# Altium PCB MCU.PcbDoc
Units mm, origin at the board's own origin, x right, y up, seen from the top; angles counter-clockwise.
Board outline 54.25 x 54.25 mm, 2 copper layers (Top Layer, Bottom Layer); 81 components, 68 nets, 250 pads, 113 vias.
Unrouted connection lines stored in the file: 1.
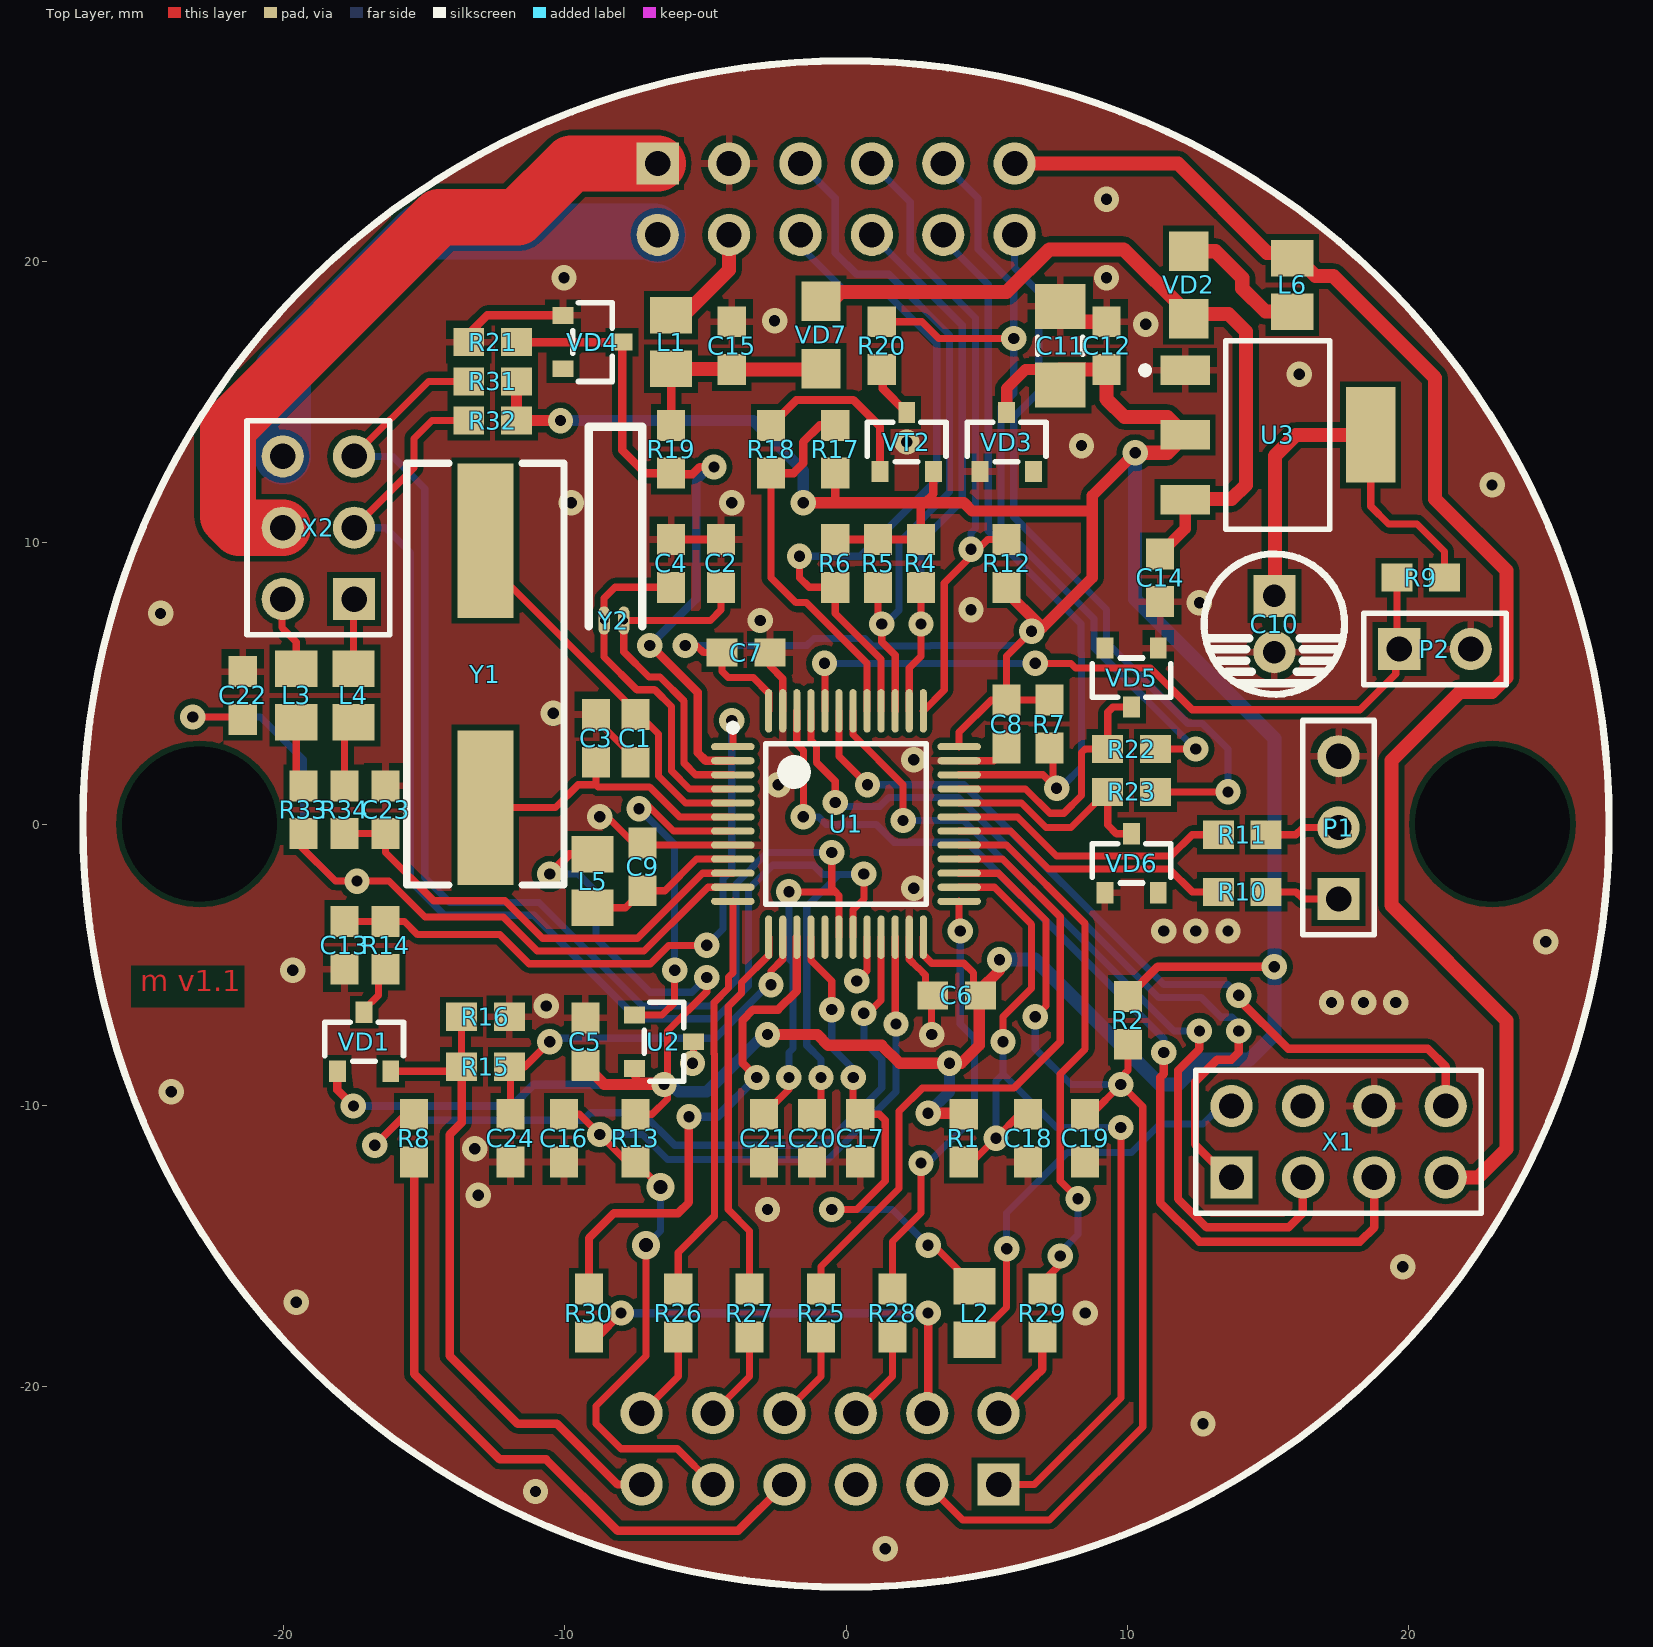
[diagram p0: Top Layer view]
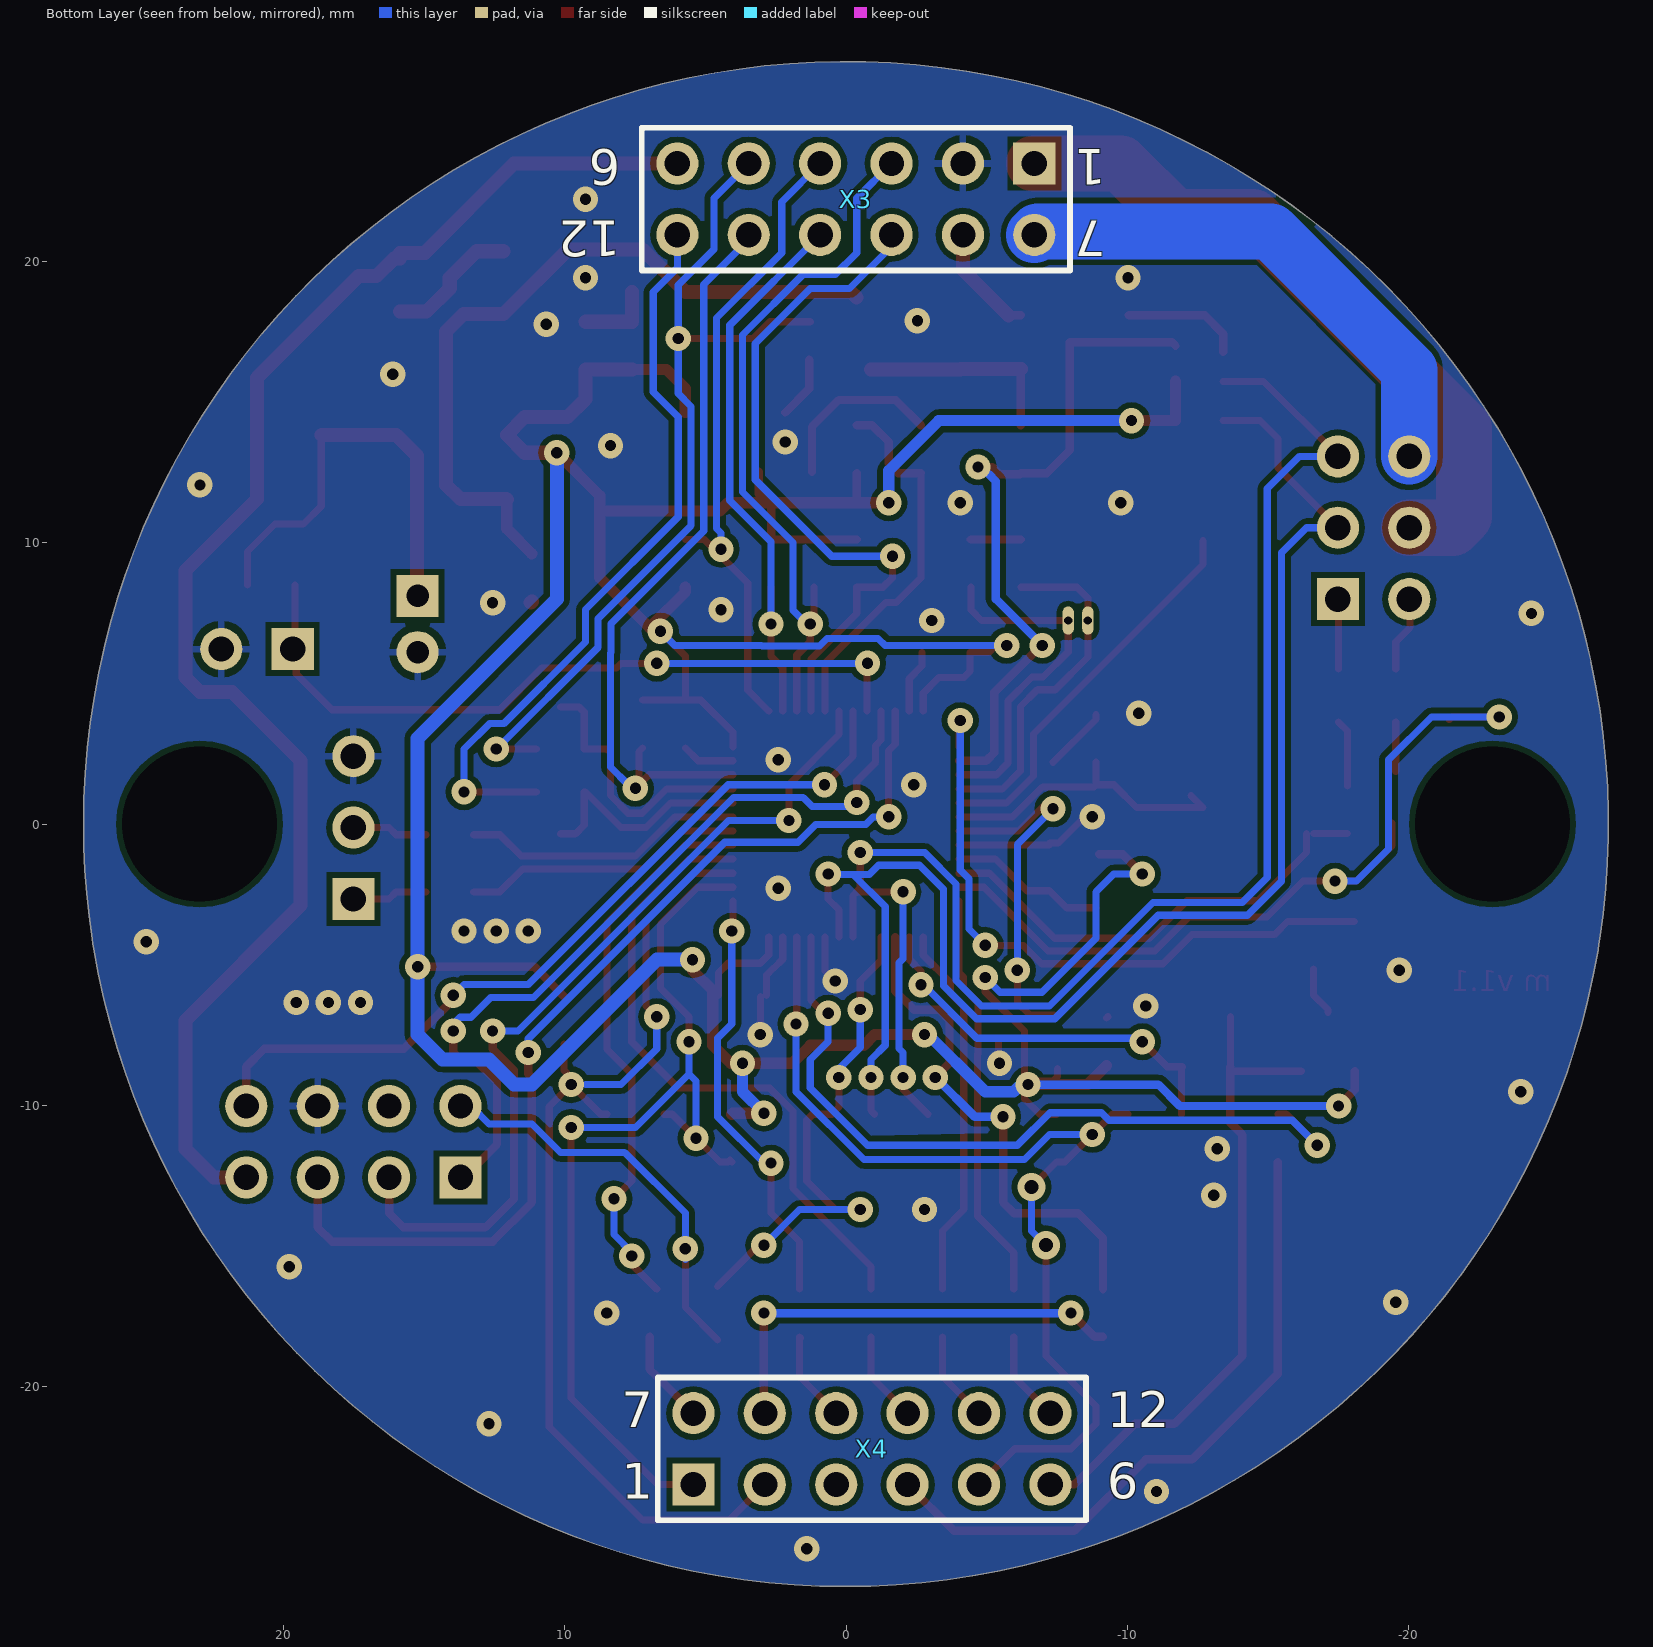
[diagram p1: Bottom Layer view, seen from below]
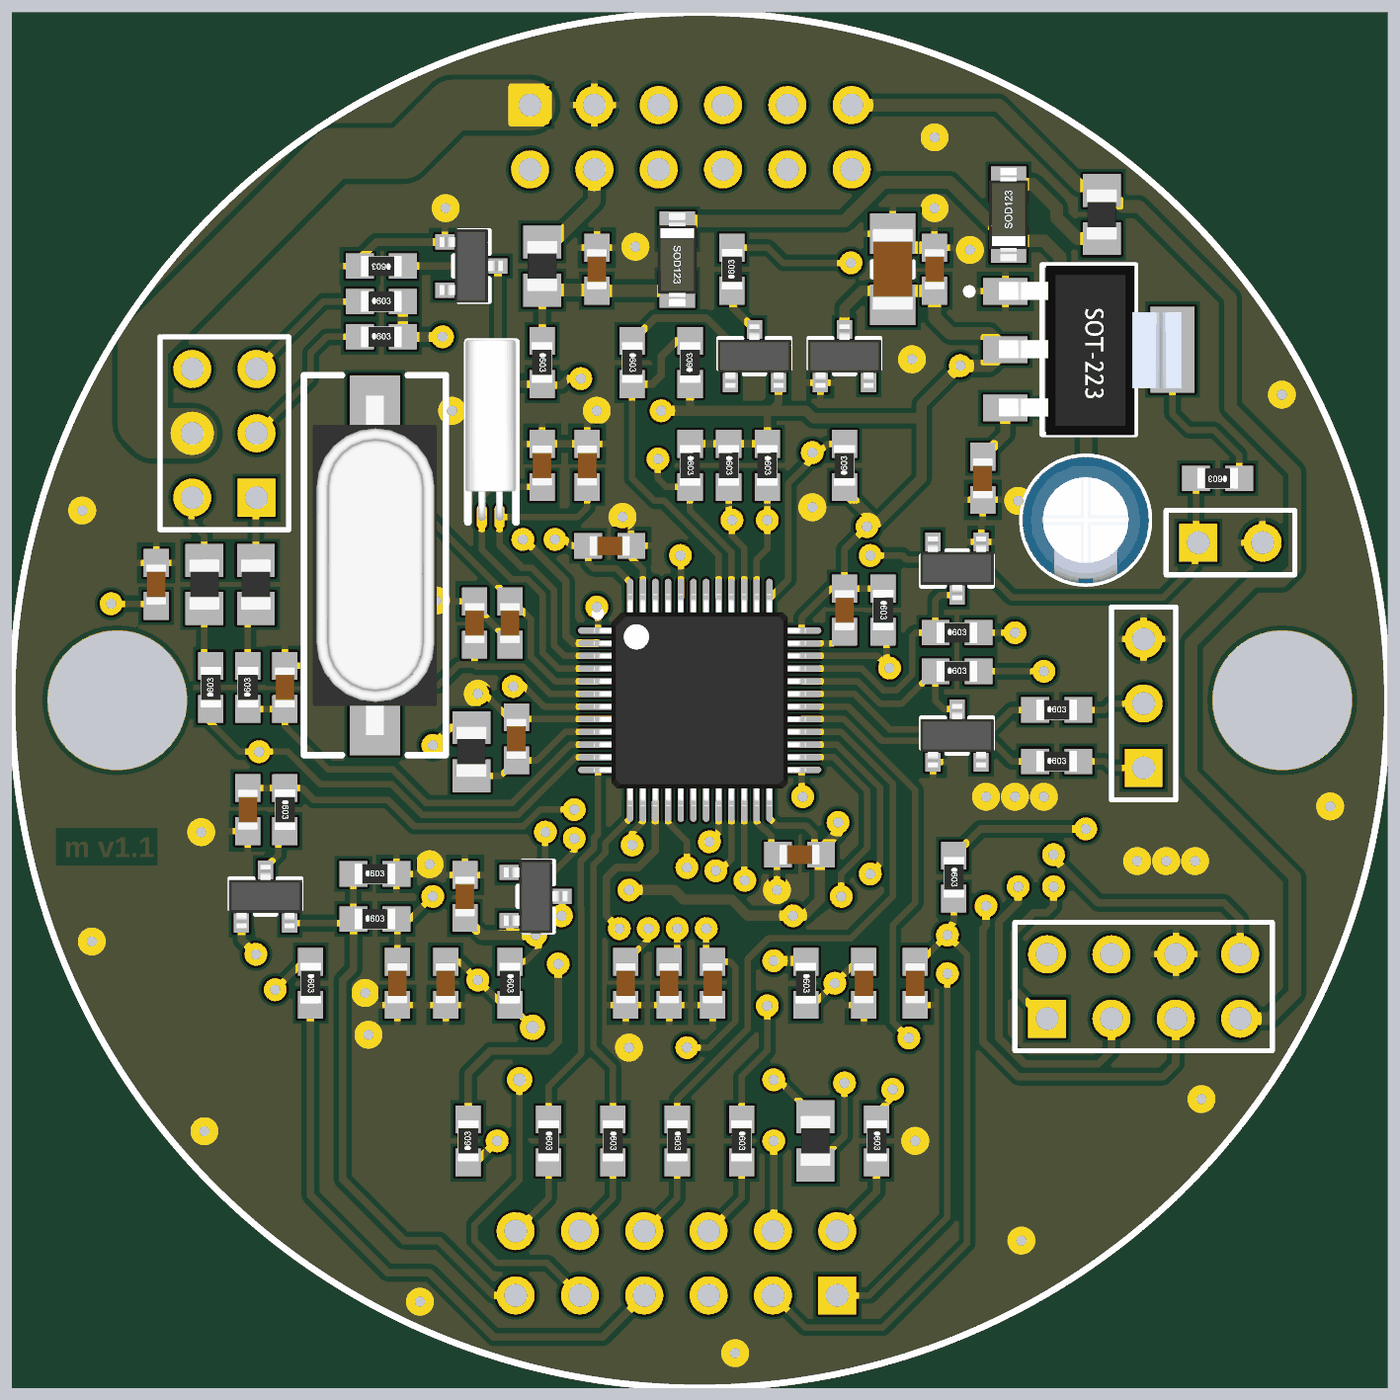
[diagram p2: 3D render of the assembled board from above, using the file's embedded part models]

## Layer stack, top to bottom
Top Solder: solder mask 0.0102, Solder Resist, Dk 3.5
Top Layer: signal copper 0.0356
Dielectric1: dielectric 0.32, FR-4, Dk 4.8
Bottom Layer: signal copper 0.0356
Bottom Solder: solder mask 0.0102, Solder Resist, Dk 3.5

## Board outline
-26.755,-4.48 cw(c0,0) -26.818,-4.086 cw(c0,0) 27.127,0 cw(c0,0) 26.818,-4.086 cw(c0,0) 26.762,-4.439 cw(c0,0)

## Design rules (kind name [scope] priority, off if disabled: settings)
Clearance [All] p1: gap=0.2
PolygonConnect PolygonConnect_isVIA [isVia] p1: connectstyle=Direct reliefconductorwidth=0.254 reliefentries=4 polygonreliefangle="90 Angle" airgapwidth=0.254
PolygonConnect PolygonConnect_1 [All] p2: connectstyle=Relief reliefconductorwidth=0.254 reliefentries=4 polygonreliefangle="90 Angle" airgapwidth=0.254
RoutingVias [All] p1: holewidth=0.4 width=0.9 viastyle="Through Hole" minholewidth=0.3 minwidth=0.6 maxholewidth=0.711 maxwidth=1.2
SilkToSolderMaskClearance SilkscreenOverComponentPads [IsPad] p1: minsilkscreentomaskgap=0.254 clearancetoexposedcopper=TRUE
SolderMaskExpansion [All] p1: expansion=0.102
Width [All] p1: maxlimit=2.2 minlimit=0.2 preferedwidth=0.254
28 further rules are at their usual default settings.

## Classes and differential pairs
component class A1: C1 C2 C3 C4 C5 C6 C7 C8 C9 C16 C17 C18 C19 C20 C21 C22 C23 L2 L3 L4 L5 P1 P2 R1 R2 R4 R5 R6 R7 R8 R9 R10 R11 R12 R13 R30 R31 R32 R33 R34 U1 U2 X1 X2 Y1 Y2
component class A2: C15 L1 R17 R18 R19 R20 R21 R22 R23 VD4 VD5 VD6 VT2
component class A3: C10 C11 C12 C13 C14 C24 L6 R14 R15 R16 U3 VD1 VD2 VD3 VD7
component class A4: R25 R26 R27 R28 R29
component class A5: X3 X4
net class USB_BUS: USB_BUS.DMINUS USB_BUS.DPLUS USB_BUS.VBUS
net class HANDOP_BUS: HANDOP_BUS.CLOSE HANDOP_BUS.OPEN
net class JTAG_BUS: JTAG_BUS.NTRST JTAG_BUS.TCK JTAG_BUS.TDI JTAG_BUS.TDO JTAG_BUS.TMS
net class POWER: POWER.GROUND POWER.VIN
net class USB_DEV_BUS: USB_DEV_BUS.D+ USB_DEV_BUS.D- USB_DEV_BUS.USB_CONNECT USB_DEV_BUS.USB_POWER
net class WiFi_BUS: WIFI_BUS.WIFI_BOOT WIFI_BUS.WIFI_CHPD WIFI_BUS.WIFI_PWR WIFI_BUS.WIFI_RX WIFI_BUS.WIFI_TX
net class WIFI_OUT_BUS: WIFI_OUT_BUS.CHPD WIFI_OUT_BUS.GPIO0 WIFI_OUT_BUS.RX WIFI_OUT_BUS.TX WIFI_OUT_BUS.VCC

## Components (designator, comment, footprint, x,y, rotation, side; value= is the part's Value field where it differs from the comment)
C1 "22p" 0603C -7.493,3.048 r90 top
C2 "15p" 0603C -4.445,9.271 r270 top
C3 "22p" 0603C -8.89,3.048 r270 top
C4 "15p" 0603C -6.223,9.271 r270 top
C5 "0.1u" 0603C -9.271,-7.747 r270 top
C6 "0.1u" 0603C 3.937,-6.096 r0 top
C7 "0.1u" 0603C -3.556,6.096 r180 top
C8 "0.1u" 0603C 5.715,3.556 r90 top
C9 "0.1u" 0603C -7.239,-1.524 r270 top
C10 "100u 6.3V" "CAP 5X...Х2" 15.24,7.112 r270 top
C11 "1u" 1206C 7.62,17.018 r270 top
C12 "0.1u" 0603C 9.271,17.018 r270 top
C13 "0.1u" 0603C -17.843,-4.318 r270 top
C14 "1u" 0603C 11.176,8.763 r90 top
C15 "1000p" 0603C -4.064,17.018 r270 top
C16 "0.1u" 0603C -10.033,-11.176 r90 top
C17 "0.1u" 0603C 0.508,-11.176 r90 top
C18 "0.1u" 0603C 6.477,-11.176 r90 top
C19 "0.1u" 0603C 8.509,-11.176 r90 top
C20 "0.1u" 0603C -1.206,-11.176 r90 top
C21 "0.1u" 0603C -2.921,-11.176 r90 top
C22 "0.1u" 0603C -21.463,4.572 r270 top
C23 "0.1u" 0603C -16.383,0.508 r270 top
C24 "0.1u" 0603C -11.938,-11.176 r270 top
L1 "BLM21PG600SN1D" 0805 -6.223,17.145 r90 top
L2 "BLM21PG600SN1D" 0805 4.572,-17.399 r90 top
L3 "BLM21PG600SN1D" 0805 -19.558,4.572 r270 top
L4 "BLM21PG600SN1D" 0805 -17.526,4.572 r270 top
L5 "BLM21PG600SN1D" 0805 -9.017,-2.032 r90 top
L6 "BLM21PG600SN1D" 0805 15.875,19.177 r90 top
P1 "BOOT_UART" HDR1X3 17.526,-2.667 r90 top
P2 "BOOT JUMPER" HDR1X2 19.685,6.223 r0 top
R1 "10K" 0603R 4.191,-11.176 r90 top
R2 "10K" 0603R 10.033,-6.985 r90 top
R4 "10K" 0603R 2.667,9.271 r90 top
R5 "10K" 0603R 1.143,9.271 r90 top
R6 "10K" 0603R -0.381,9.271 r90 top
R7 "10K" 0603R 7.239,3.556 r90 top
R8 "100" 0603R -15.367,-11.176 r90 top
R9 "1K" 0603R 20.447,8.763 r0 top
R10 "270" 0603R 14.097,-2.413 r180 top
R11 "270" 0603R 14.097,-0.381 r180 top
R12 "10K" 0603R 5.715,9.271 r270 top
R13 "10K" 0603R -7.493,-11.176 r90 top
R14 "1K" 0603R -16.383,-4.318 r90 top
R15 "10K" 0603R -12.827,-8.636 r180 top
R16 "100K" 0603R -12.827,-6.858 r180 top
R17 "10K" 0603R -0.381,13.335 r270 top
R18 "3K" 0603R -2.667,13.335 r90 top
R19 "10K" 0603R -6.223,13.335 r90 top
R20 "1.5K" 0603R 1.27,17.018 r270 top
R21 "100K" 0603R -12.573,17.145 r0 top
R22 "30" 0603R 10.16,2.667 r180 top
R23 "30" 0603R 10.16,1.143 r180 top
R25 "100" 0603R -0.889,-17.399 r90 top
R26 "100" 0603R -5.969,-17.399 r90 top
R27 "100" 0603R -3.429,-17.399 r90 top
R28 "100" 0603R 1.651,-17.399 r90 top
R29 "100" 0603R 6.985,-17.399 r90 top
R30 "100" 0603R -9.144,-17.399 r270 top
R31 "10K" 0603R -12.573,15.748 r180 top
R32 "10K" 0603R -12.573,14.351 r180 top
R33 "200" 0603R -19.304,0.508 r270 top
R34 "200" 0603R -17.843,0.508 r270 top
U1 "STM32F103C8T6" LQFP48_L 0,0 r0 top
U2 "MCP100" SOT95P230X110-3L -6.477,-7.747 r0 top
U3 "LD1117AS12TR" SOT223 15.367,13.843 r270 top
VD1 "BAT54C" SOT95P230X110-3L -17.145,-7.747 r90 top
VD2 "MBR0540" SOD123 12.192,19.177 r270 top
VD3 "BZX84C3V6" SOT23_1DIODE 5.715,13.589 r90 top
VD4 "BZX84C3V6" SOT23_1DIODE -9.017,17.145 r0 top
VD5 "BZX84C3V6" SOT23_1DIODE 10.16,5.207 r270 top
VD6 "BZX84C3V6" SOT23_1DIODE 10.16,-1.397 r90 top
VD7 "MBR0540" SOD123 -0.889,17.399 r90 top
VT2 "BC807" SOT95P230X110-3L 2.159,13.589 r90 top
X1 "CON8" HDR2X4_CEN 13.716,-12.573 r0 top
X2 "CON6" HDR2X3_CEN -17.5,8 r90 top (schematic designator X4)
X3 "CON12" HDR2X6_CEN -6.7,23.5 r0 bottom
X4 "CON12" HDR2X6_CEN 5.429,-23.5 r180 bottom
Y1 "8 MHz" HC49(CRYSTAL) -12.827,5.334 r270 top
Y2 "32768 Hz" "XTAL 32kHz -1" -8.255,7.239 r0 top

## Footprints (in the part's own frame and the unit in brackets; to place one, negate y for a bottom-side part, rotate by r counter-clockwise, add the part's x,y. Pads: shape width x height; smd on the part's side, far side on the other; paste and mask are expansions set on the pad)
0603C [mm]
  rect 1.1x1 smd: 1(-0.85,0) 2(0.85,0)
  body extent -0.8,-0.4 0.8,0.4, height 0.8
0603R [mm]
  rect 1.1x1 smd: 1(-0.85,0) 2(0.85,0)
  body extent -0.8,-0.41 0.8,0.41, height 0.45
0805 [mm]
  rect 1.3x1.5 smd: 1(-0.95,0) 2(0.95,0)
  body extent -1,-0.6 1,0.6, height 0.95
1206C [mm]
  rect 1.6x1.8 smd: 1(-1.4,0) 2(1.4,0)
  silkscreen extent -0.3,-0.8 0.3,0.8, body extent -1.6,-0.8 1.6,0.8, height 1.6
"CAP 5X...Х2" [mm] "конденсатор электролитический D=5 и межвыв.=2"
  rect 1.5x1.5 hole 0.8: 1(-1,0)
  round 1.5 hole 0.8: 2(1,0)
  silkscreen extent -2.5,-2.5 2.5,2.5, body extent -2.5,-2.5 2.5,2.5, height 11
HC49(CRYSTAL) [mm]
  rect 5.5x2 smd: 1(-4.75,0) 2(4.75,0)
  silkscreen extent -7.5,-2.8 7.5,2.8, body extent -6.7,-2.45 6.7,2.45, height 5.08
HDR1X2 [mm] "Connector; Header; 2 Position"
  rect 1.5x1.5 hole 0.9: 1(0,0)
  round 1.5 hole 0.9: 2(2.54,0)
  silkscreen extent -1.27,-1.27 3.81,1.27
HDR1X3 [mm] "Connector; Header; 3 Position"
  rect 1.5x1.5 hole 0.9: 1(0,0)
  round 1.5 hole 0.9: 2(2.54,0) 3(5.08,0)
  silkscreen extent -1.27,-1.27 6.35,1.27
HDR2X3_CEN [mm] "Connector; Header; 3x2 Position"
  rect 1.5x1.5 hole 0.9: 1(0,0)
  round 1.5 hole 0.9: 2(2.54,0) 3(5.08,0) 4(0,2.54) 5(2.54,2.54) 6(5.08,2.54)
  silkscreen extent -1.27,-1.27 6.35,3.81
HDR2X4_CEN [mm] "Connector; Header; 4x2 Position"
  rect 1.5x1.5 hole 0.9: 1(0,0)
  round 1.5 hole 0.9: 2(2.54,0) 3(5.08,0) 4(7.62,0) 5(0,2.54) 6(2.54,2.54) 7(5.08,2.54) 8(7.62,2.54)
  silkscreen extent -1.27,-1.27 8.89,3.81
HDR2X6_CEN [mm] "Connector; Header; 6x2 Position"
  rect 1.5x1.5 hole 0.9: 1(0,0)
  round 1.5 hole 0.9: 2(2.54,0) 3(5.08,0) 4(7.62,0) 5(10.16,0) 6(12.7,0) 7(0,2.54) 8(2.54,2.54) 9(5.08,2.54) 10(7.62,2.54) 11(10.16,2.54) 12(12.7,2.54)
  silkscreen extent -1.27,-1.27 13.97,3.81
LQFP48_L [mm] "Thin QFP, 48-Leads, Body 7x7mm, Pitch 0.5mm, IPC High Density"
  oval 1.55x0.25 smd: 1(-4.025,2.75) 2(-4.025,2.25) 3(-4.025,1.75) 4(-4.025,1.25) 5(-4.025,0.75) 6(-4.025,0.25) 7(-4.025,-0.25) 8(-4.025,-0.75) 9(-4.025,-1.25) 10(-4.025,-1.75) 11(-4.025,-2.25) 12(-4.025,-2.75) 25(4.025,-2.75) 26(4.025,-2.25) 27(4.025,-1.75) 28(4.025,-1.25) 29(4.025,-0.75) 30(4.025,-0.25) 31(4.025,0.25) 32(4.025,0.75) 33(4.025,1.25) 34(4.025,1.75) 35(4.025,2.25) 36(4.025,2.75)
  oval 0.25x1.55 smd: 13(-2.75,-4.025) 14(-2.25,-4.025) 15(-1.75,-4.025) 16(-1.25,-4.025) 17(-0.75,-4.025) 18(-0.25,-4.025) 19(0.25,-4.025) 20(0.75,-4.025) 21(1.25,-4.025) 22(1.75,-4.025) 23(2.25,-4.025) 24(2.75,-4.025) 37(2.75,4.025) 38(2.25,4.025) 39(1.75,4.025) 40(1.25,4.025) 41(0.75,4.025) 42(0.25,4.025) 43(-0.25,4.025) 44(-0.75,4.025) 45(-1.25,4.025) 46(-1.75,4.025) 47(-2.25,4.025) 48(-2.75,4.025)
  silkscreen extent -4.15,-2.85 2.85,3.55, body extent -4.57,-4.57 4.57,4.57, height 1.42
SOD123 [mm]
  rect 1.4x1.4 smd: A(-1.2,0) K(1.2,0)
  body extent -1.85,-0.77 1.85,0.77, height 1.35
SOT23_1DIODE [mm] "SOT23, 3-Leads, Body 3.0x1.4mm (max), Pitch 0.95mm, IPC High Density 3DModel=\"SOT23\""
  rect 0.75x0.6 smd: A(-1.05,0.95) K(1.05,0) ""(-1.05,-0.95)
  silkscreen extent -0.7,-1.4 0.7,1.4, body extent -1.25,-1.5 1.25,1.5, height 1.1
SOT95P230X110-3L [mm] "SOT23, 3-Leads, Body 3.0x1.4mm (max), Pitch 0.95mm, IPC High Density 3DModel=\"SOT23\""
  rect 0.75x0.6 smd: 1(-1.05,0.95) 2(-1.05,-0.95) 3(1.05,0)
  silkscreen extent -0.7,-1.4 0.7,1.4, body extent -1.25,-1.5 1.25,1.5, height 1.1
SOT223 [mm]
  rect 1.05x1.75 smd: 1(-2.3,-3.3) 2(0,-3.3) 3(2.3,-3.3)
  rect 3.4x1.75 smd: 4(0,3.3)
  silkscreen extent -3.35,-4.85 3.35,1.85, body extent -3.32,-3.55 3.38,3.66, height 1.82
"XTAL 32kHz -1" [mm] "кварцевый резонатор D=2 и межвыв.=0.7"
  oval 0.4x1 hole 0.3: 1(-0.35,0) 2(0.35,0)
  silkscreen extent -0.9,-0.2 1,6.9, body extent -1,-0.14 1,7, height 4.02

## Part data
C1 C2 C3 C4 C5 C6 C7 C8 C9 C13 C15 C16 C17 C18 C19 C20 C21 C22 C23 C24: library part CAP, "Конденсатор обыкновенный"
C10: library part "Cap Pol1", "Polarized Capacitor (Radial)"
C11 C12 C14: library part Cap, "Capacitor"
L1 L2 L3 L4 L5 L6: library part INDUCTOR_, "Индуктивность"
P1: library part "Header 3", "Header, 3-Pin"
P2: library part "Header 2", "Header, 2-Pin"
R1 R2 R4 R5 R6 R7 R8 R9 R10 R11 R12 R13 R14 R15 R16 R17 R18 R19 R20 R21 R22 R23 R25 R26 R27 R28 R29 R30 R31 R32 R33 R34: library part RES, "Резистор обыкновенный"
U1: "STM32 ARM-based 32-bit MCU Performance Line with 64 kB Flash, 20 kB Internal RAM, -40 to +85°C Temperature, 48-Pin LQFP, Tray"
U2: library part RESET_CIRCUIT, "RESET CIRCUIT"
U3: "1A, Low Drop Positive Voltage Regulator, 1.2V, 4-Pin SOT-223, Tape and Reel"
VD1: library part DIODE_PAIR_C, "диодная сборка(общий катод)"
VD2 VD7: library part DIODE, "Диод"
VD3 VD4 VD5 VD6: library part ZENNER, "Стабилитрон"
VT2: library part SOT32_PNP, "Биполярный PNP транзистор"
X1 X2: "штыри(папа)"
X3 X4: "штыри(мама)"
Y1 Y2: library part XTAL, "Crystal Oscillator"

## Free pads (board coordinates)
  round 4.5 hole 5.5: 0(-23,0) 1(23,0)

## Via types
v1: diameter 0.9, hole 0.4, Top Layer to Bottom Layer, 111 vias
v2: diameter 1, hole 0.5, Top Layer to Bottom Layer, 2 vias

## Nets (pads, with @x,y where several pads share a name; then routed paths per layer and width w, separated by ;. In a path a pad name is that pad's centre, name@x,y a point inside that pad or via, vN(x,y) a via of type N, cw(c..) or ccw(c..) an arc to the next point about the centre after c; other vN are vias at no path point)
+3.3V_MC: C5.2 C6.2 C7.2 C8.2 C10.1 C11.2 C12.2 L5.2 R1.2 R2.2 R4.2 R5.2 R6.2 R7.2 R9.2 R12.2 R13.2 R17.2 R31.1 R32.1 U1.24 U1.36 U1.48 U2.2 U3.2 U3.4 VD1.1 VD3.K VT2.2 | length 189
  Top Layer w0.254: U2.2 -7.527,-8.983 -7.366,-9.144 v1@-6.35,-9.144 ; R13.2 -6.897,-10.326 -6.35,-9.779 v1@-6.35,-9.144 ; v1(-5.715,6.35) -5.315,6.35 -5.061,6.096 C7.2 -4.406,5.422 -4.191,5.207 -3.302,5.207 -2.75,4.655 U1.48 ; v1(-4.953,-5.461) -4.953,-5.969 -6.35,-7.366 v1@-6.35,-9.144 ; U1.24 2.75,-4.655 3.048,-4.953 4.191,-4.953 4.533,-5.295 C6.2@4.533,-6.096 ; U1.36 4.025,3.263 5.168,4.406 C8.2 ; v1(6.604,6.858) 5.715,5.969 C8.2 ; R7.2 C8.2 ; U3.4 18.667,11.305 19.304,10.668 20.32,10.668 21.297,9.691 R9.2@21.297,8.509
  Top Layer w0.3: VD1.1 -18.095,-9.464 v1(-17.526,-10.033) ; v1(-10.541,-1.778) -9.845,-1.082 L5.2 ; R6.2 R5.2 R4.2 2.667,11.303 2.794,11.43 3.109,11.745 VT2.2 ; -0.381,11.43 R17.2 ; R2.2 11.088,-5.08 v1(15.24,-5.08)
  Top Layer w0.4: R31.1 R32.1 v1(-10.16,14.351) ; C5.2 -8.597,-9.271 v1(-6.477,-9.271) ; v1@-2.794,-7.366 -2.667,-7.493 -1.016,-7.493 -0.635,-7.874 1.27,-7.874 1.905,-8.509 4.103,-8.509 4.738,-7.874 4.738,-5.93 5.461,-5.207 v1(5.461,-4.826) ; v1(-1.524,11.43) -0.381,11.43 2.794,11.43 4.191,11.43 4.487,11.134 8.721,11.134 8.763,11.176 ; v1(2.921,-10.287) 4.025,-10.287 R1.2@4.064,-10.326 ; R12.2 5.715,8.255 v1@6.858,7.112 ; VD3.K 5.715,15.494 6.389,16.168 C11.2@7.62,16.168 ; v1@6.985,6.985 8.763,8.763 8.763,11.176 ; v1(10.287,13.208) 8.763,11.684 8.763,11.176
  Top Layer w0.5: C11.2@7.62,16.168 C12.2 9.271,15.113 9.906,14.478 11.432,14.478 U3.2 11.432,13.208 v1(10.287,13.208) ; C10.1 15.255,8.127 15.255,13.096 16.002,13.843 U3.4
  Bottom Layer w0.254: v1@-10.287,-1.905 -10.16,-1.778 -9.525,-1.778 -8.89,-2.413 -8.89,-4.064 -6.97,-5.984 -5.476,-5.984 v1(-4.953,-5.461) ; v1(-5.715,6.35) -1.397,6.35 -1.143,6.604 0.679,6.604 0.948,6.335 2.989,6.335 3.004,6.35 6.096,6.35 v1(6.604,6.858)
  Bottom Layer w0.3: v1(-17.526,-10.033) -11.874,-10.033 -11.112,-9.271 v1(-6.477,-9.271)
  Bottom Layer w0.4: v1(-10.16,14.351) -3.302,14.351 -1.524,12.573 v1(-1.524,11.43) ; v1@-6.477,-9.144 -6.35,-9.144 -5.969,-9.525 -4.953,-9.525 v1@-2.794,-7.366 ; v1(2.921,-10.287) 3.683,-9.525 v1(3.683,-8.509)
  Bottom Layer w0.5: v1(5.461,-4.826) 6.731,-4.826 10.403,-8.498 10.403,-8.501 11.173,-9.271 11.811,-9.271 12.7,-8.382 14.351,-8.382 15.24,-7.493 15.24,3.048 10.287,8.001 v1(10.287,13.208)
  other v1: -2.794,-7.493
+5V: L6.2 X1.4 X3.6 | length 53.2
  Top Layer w0.5: X3.6 11.806,23.5 14.986,20.32 L6.2@15.875,20.32 ; L6.2 16.068,20.127 16.7,19.494 17.335,19.494 20.955,15.875 20.955,11.557 23.495,9.017 23.495,5.207 22.987,4.699 21.844,4.699 19.401,2.256 19.401,-2.891 23.495,-6.985 23.495,-11.557 22.479,-12.573 X1.4
+VBUS: C15.2 L1.1 R19.2 VD7.A | length 7.4
  Top Layer w0.3: R19.2 L1.1 ; C15.2@-4.091,16.195 C15.2
  Top Layer w0.5: L1.1 C15.2@-4.091,16.195 ; C15.2 VD7.A@-0.889,16.168
AIN_12V: C22.2 R33.2 U1.11 | length 30.6
  Top Layer w0.254: v1(-23.241,3.81) -21.551,3.81 C22.2 ; R33.2@-19.431,0.039 -19.431,-0.762 -18.161,-2.032 v1(-17.399,-2.032) -16.256,-2.032 -14.979,-3.309 -12.192,-3.309 -10.983,-4.518 -7.185,-4.518 -5.341,-2.674 -5.334,-2.674 -4.91,-2.25 U1.11
  Bottom Layer w0.254: v1(-23.241,3.81) -20.828,3.81 -19.304,2.286 -19.304,-0.889 -18.161,-2.032 v1(-17.399,-2.032)
AIN_MOTOR: C23.2 R34.2 U1.10 | length 16.5
  Top Layer w0.254: R34.2 C23.2@-16.637,-0.342 ; C23.2 -16.383,-1.016 -14.668,-2.73 -12.128,-2.73 -10.795,-4.064 -7.417,-4.064 -5.103,-1.75 U1.10
"BOOT RX": P1.2 R11.1 | length 2.7
  Top Layer w0.254: R11.1 16.002,-0.381 16.256,-0.127 P1.2
"BOOT TX": P1.1 R10.1 | length 2.7
  Top Layer w0.254: R10.1 16.002,-2.413 16.256,-2.667 P1.1
BUTTON_CON: C16.2 R13.1 U1.22 X4.5 | length 36.3
  Top Layer w0.254: C16.2 -9.486,-10.326 v1(-8.763,-11.049) -7.786,-12.026 R13.1 v2(-6.604,-12.915) ; v2(-7.112,-14.986) -7.112,-18.923 -8.89,-20.701 -8.89,-21.336 -8.001,-22.225 -6.005,-22.225 X4.5 ; U1.22 1.75,-7.084 v1(1.778,-7.112)
  Bottom Layer w0.254: v1(-8.763,-11.049) -7.239,-11.049 -6.35,-11.938 -0.635,-11.938 1.778,-9.525 v1(1.778,-7.112) ; v2(-7.112,-14.986) -6.604,-14.478 v2(-6.604,-12.915)
CLUTCH_ON_OFF: U1.43 X1.8 | length 29.3
  Top Layer w0.254: U1.43 -0.25,2.409 v1(0.762,1.397)
  Top Layer w0.3: v1(13.97,-6.096) 13.97,-6.235 15.736,-8.001 20.701,-8.001 21.336,-8.636 X1.8
  Bottom Layer w0.254: v1(0.762,1.397) 4.191,1.397 11.303,-5.715 13.589,-5.715 v1(13.97,-6.096)
EN1_IN: C21.2 R31.2 U1.18 X2.3 | length 55.8
  Top Layer w0.254: X2.3 -17.5,13.107 -14.859,15.748 R31.2 ; C21.2 -2.032,-9.437 v1(-2.032,-9.017) ; v1(-2.032,-2.413) -0.381,-2.413 ; v1(-0.508,-1.016) -0.508,-2.286 -0.381,-2.413 ; U1.18 -0.25,-2.544 -0.381,-2.413
  Bottom Layer w0.254: X2.3 -17.499,13.081 -16.129,13.081 -14.986,11.938 -14.986,-1.905 -14.097,-2.794 -10.922,-2.794 -7.239,-6.477 -4.826,-6.477 -3.918,-5.569 -3.918,-2.133 -2.801,-1.016 v1(-0.508,-1.016) ; v1(-2.032,-9.017) -2.032,-8.128 -1.89,-7.986 -1.89,-4.938 -2.032,-4.796 v1(-2.032,-2.413)
EN2_IN: C20.2 R32.2 U1.19 X2.2 | length 54.8
  Top Layer w0.254: X2.2 -15.367,12.673 -15.367,13.716 -14.732,14.351 R32.2 ; C20.2@-1.016,-10.326 -0.889,-10.199 v1(-0.889,-9.017) ; v1@-1.016,-9.017 v1@-1.016,-8.763 ; U1.19 0.25,-3.052 0.635,-2.667 v1(0.635,-1.778)
  Bottom Layer w0.254: X2.2 -16.382,10.54 -15.494,9.652 -15.494,-2.039 -14.285,-3.248 -11.11,-3.248 -7.427,-6.931 -4.638,-6.931 -3.464,-5.757 -3.464,-2.321 -2.613,-1.47 -1.153,-1.47 -0.83,-1.793 -0.254,-1.793 ; v1(-0.889,-9.017) -0.889,-8.382 -1.397,-7.874 -1.397,-2.936 -0.254,-1.793 ; v1(0.635,-1.778) 0.62,-1.793 -0.254,-1.793
GND: C1.1 C2.1 C3.1 C4.1 C5.1 C6.1 C7.1 C8.1 C9.1 C10.2 C11.1 C12.1 C13.2 C14.1 C15.1 C16.1 C17.1 C18.1 C19.1 C20.1 C21.1 C22.1 C23.1 C24.2 P1.3 P2.2 R16.1 R21.1 U1.8 U1.20 U1.23 U1.35 U1.47 U2.3 U3.1 VD3.A VD4.A VD5.A VD6.A X1.7 X3.2 | length 27
  Top Layer w0.254: v1(-19.685,-5.207) v1@-19.646,-5.168 ; v1@-10.414,3.81 v1@-10.326,3.898 ; C5.1@-9.31,-6.858 C5.1 ; C3.1 -8.89,3.722 C1.1@-7.366,2.198 ; v1(-8.763,0.254) -8.491,0.254 -7.563,-0.674 C9.1 ; C9.1@-7.239,-0.75 U1.8 ; v1(-5.461,-8.509) -5.427,-8.475 U2.3 ; C7.1 -2.706,5.627 -2.25,5.171 U1.47 ; v1(0.381,-5.588) 0.75,-5.219 U1.20 ; U1.23 2.25,-4.814 2.563,-5.127 2.58,-5.127 2.833,-5.38 C6.1@2.833,-6.096 ; v1(2.413,2.286) v1@2.449,2.25 ; v1(3.048,-7.493) C6.1@3.048,-6.135 ; U1.35 5.259,2.25 C8.1
  Top Layer w0.3: R21.1@-13.423,16.803 -13.423,17.438 -12.766,18.095 VD4.A ; v1@-10.067,19.397 v1(-10.033,19.431) ; C4.1 C2.1 ; v1@-2.579,17.868 v1(-2.54,17.907)
  Top Layer w0.5: C11.1@7.62,18.923 7.62,17.868 C12.1 ; C14.1 C14.1@11.215,7.874
  other v1: 1.397,-25.781 -11.049,-23.749 12.7,-21.336 8.509,-17.399 -19.558,-17.018 19.812,-15.748 -2.794,-13.716 -13.081,-13.208 -13.208,-11.557 -24.003,-9.525 -10.668,-6.477 17.272,-6.35 18.415,-6.35 19.558,-6.35 24.892,-4.191 11.303,-3.81 12.446,-3.81 13.589,-3.81 2.413,-2.286 -2.413,1.397 -10.414,3.937 -3.048,7.239 -24.384,7.493 4.445,7.62 12.573,7.874 -9.779,11.43 -4.064,11.43 22.987,12.065 8.382,13.462 2.159,13.589 16.129,16.002 10.668,17.78 9.271,19.431 9.271,22.225
HANDOP_BUS.CLOSE: C19.2 R2.1 U1.27 X4.2 | length 36.9
  Top Layer w0.254: X4.2 4.155,-24.765 7.239,-24.765 10.556,-21.448 10.556,-10.048 v1(9.779,-9.271) ; U1.27 5.426,-1.75 7.112,-3.436 7.112,-6.477 v1(6.731,-6.858) ; C19.2 8.724,-10.326 v1(9.779,-9.271) ; R2.1 10.033,-8.763 9.779,-9.017 v1(9.779,-9.271)
  Bottom Layer w0.254: v1(6.731,-6.858) 6.731,-8.001 8.001,-9.271 9.271,-9.271
HANDOP_BUS.OPEN: C18.2 R1.1 U1.26 X4.1 | length 34.6
  Top Layer w0.254: U1.26 5.284,-2.25 6.604,-3.57 6.604,-5.842 5.588,-6.858 v1(5.588,-7.747) ; R1.1@4.064,-12.026 R1.1@4.127,-11.962 ; R1.1 4.484,-12.026 v1(5.334,-11.176) 6.184,-10.326 C18.2 ; X4.1 6.7,-23.5 9.779,-20.421 v1@9.779,-10.541
  Bottom Layer w0.254: v1(5.334,-11.176) 5.334,-9.144 5.588,-8.89 ; v1(5.588,-7.747) 5.588,-8.89 ; v1@9.525,-10.795 7.493,-10.795 5.588,-8.89
  other v1: 9.779,-10.795
JTAG_BUS.NTRST: R6.1 U1.40 X3.9 | length 24.8
  Top Layer w0.254: v1(-1.651,9.525) -1.651,8.763 -1.309,8.421 R6.1 -0.381,7.493 1.25,5.862 U1.40
  Bottom Layer w0.254: v1(-1.651,9.525) 0.508,9.525 3.229,12.246 3.229,17.091 1.27,19.05 -0.127,19.05 -1.62,20.543 X3.9
JTAG_BUS.TCK: R12.1 U1.37 X3.4 | length 23.3
  Top Layer w0.254: U1.37 2.755,4.025 3.494,4.764 3.494,8.574 4.445,9.525 5.041,10.121 R12.1
  Bottom Layer w0.254: X3.4 2.286,22.134 2.286,20.32 4.607,17.999 4.607,10.51 4.445,10.348 v1@4.445,9.525
  other v1: 4.445,9.779
JTAG_BUS.TDI: R4.1 U1.38 X3.10 | length 20.4
  Top Layer w0.254: U1.38 2.25,5.552 2.667,5.969 v1(2.667,7.112) R4.1
  Bottom Layer w0.254: X3.10 4.137,17.743 4.137,11.51 2.667,10.04 v1(2.667,7.112)
JTAG_BUS.TDO: R5.1 U1.39 X3.3 | length 24.7
  Top Layer w0.254: v1@1.143,7.366 R5.1 ; v1(1.27,7.112) 1.27,6.484 1.75,6.004 U1.39
  Bottom Layer w0.254: X3.3 -0.381,22.261 -0.381,20.32 0.381,19.558 1.524,19.558 3.683,17.399 3.683,11.811 1.89,10.018 1.89,7.605 1.397,7.112 v1(1.27,7.112)
JTAG_BUS.TMS: R7.1 U1.34 X3.11 | length 27.1
  Top Layer w0.254: U1.34 7.013,1.75 7.366,1.397 7.366,2.579 R7.1
  Bottom Layer w0.254: X3.11 3.46,20.797 5.061,19.196 5.061,10.426 8.363,7.124 8.363,6.101 8.378,6.085 8.378,2.028 7.747,1.397 v1@7.366,1.397
  other v1: 7.493,1.27
LED1: R8.2 U1.21 | length 27.9
  Top Layer w0.254: v1(-16.764,-11.43) -15.66,-10.326 R8.2 ; v1@0.508,-7.011 1.25,-6.269 U1.21
  Bottom Layer w0.254: v1(-16.764,-11.43) -15.875,-10.541 -9.354,-10.541 -9.085,-10.272 -7.254,-10.272 -6.096,-11.43 -0.769,-11.43 1.27,-9.391 1.27,-8.382 0.635,-7.747 v1(0.635,-6.731)
LED2: R30.1 U1.15 | length 18.3
  Top Layer w0.3: R30.1 -9.144,-14.732 -8.255,-13.843 -5.969,-13.843 -5.588,-13.462 v1(-5.588,-10.414) ; v1@-3.302,-8.89 -3.683,-8.509 -3.683,-6.985 -3.302,-6.604 -2.413,-6.604 -1.75,-5.941 U1.15
  Bottom Layer w0.254: v1@-3.182,-9.017 v1(-3.175,-9.017)
  Bottom Layer w0.3: v1(-5.588,-10.414) -4.579,-10.414 v1@-3.182,-9.017
MOTOR_ON_OFF: U1.42 X1.2 | length 30.9
  Top Layer w0.254: U1.42 0.25,3.179 2.032,1.397 v1(2.032,0.127)
  Top Layer w0.3: v1(12.573,-7.366) 12.573,-8.001 11.811,-8.763 11.811,-13.335 12.827,-14.351 15.748,-14.351 16.256,-13.843 X1.2
  Bottom Layer w0.254: v1(2.032,0.127) 4.177,0.127 11.67,-7.366 v1(12.573,-7.366)
MOVE_CCW: U1.46 X1.3 | length 36.2
  Top Layer w0.254: U1.46 -1.75,2.849 -1.509,2.608 -1.509,0.269 v1(-1.524,0.254)
  Top Layer w0.3: v1@11.176,-8.255 v1(11.303,-8.128) 11.303,-8.89 11.176,-9.017 11.176,-13.462 12.573,-14.859 18.288,-14.859 18.796,-14.351 X1.3
  Bottom Layer w0.254: v1(-1.524,0.254) -0.972,0.254 -0.703,-0.015 1.075,-0.015 1.71,-0.65 4.312,-0.65 11.303,-7.641 v1(11.303,-8.128)
MOVE_CW: U1.45 X1.1 | length 29.1
  Top Layer w0.254: U1.45 -1.25,2.991 -1.055,2.796 -1.055,2.198 -0.381,1.524 v1(-0.381,0.762)
  Top Layer w0.3: X1.1 13.589,-12.573 12.416,-11.4 12.416,-9.174 13.208,-8.382 13.716,-8.382 13.97,-8.128 v1(13.97,-7.366) v1@14.224,-7.366
  Bottom Layer w0.254: v1(-0.381,0.762) -0.239,0.62 1.201,0.62 1.524,0.943 4.003,0.943 11.115,-6.169 12.639,-6.169 13.343,-6.873 13.731,-6.873 14.224,-7.366 v1(13.97,-7.366)
NetC1_2: C1.2 U1.5 Y1.1 | length 13.9
  Top Layer w0.254: Y1.1@-12.7,10.084 -12.7,9.232 -6.666,3.198 -6.666,1.706 -5.71,0.75 U1.5
NetC2_2: C2.2 U1.3 Y2.2 | length 12.5
  Top Layer w0.254: C2.2 -4.445,7.62 -4.826,7.239 Y2.2 -7.905,6.127 -7.007,5.229 -6.619,5.229 -5.758,4.368 -5.758,2.159 -5.349,1.75 U1.3
NetC3_2: C3.2 U1.6 Y1.2 | length 10.9
  Top Layer w0.254: Y1.2@-12.268,1.016 -12.7,0.584 -10.338,0.584 -9.525,1.397 -8.89,1.397 ; C3.2 -8.89,1.397 ; U1.6 -5.914,0.25 -6.985,1.321 -8.814,1.321 -8.89,1.397
NetC4_2: C4.2 U1.4 Y2.1 | length 12.5
  Top Layer w0.254: C4.2 -8.216,8.421 -8.605,8.032 Y2.1 -8.605,5.938 -7.442,4.775 -6.807,4.775 -6.212,4.18 -6.212,1.894 -5.568,1.25 U1.4
NetC9_2: C9.2 L5.1 U1.9 | length 5.6
  Top Layer w0.254: L5.1@-8.89,-2.982 -7.847,-2.982 C9.2 -6.438,-2.374 -5.314,-1.25 U1.9
NetC14_2: C14.2 U3.3 VD2.K VD7.K | length 26.7
  Top Layer w0.4: C14.2 12.067,10.504 U3.3
  Top Layer w0.5: VD7.K@-0.381,18.726 -0.184,18.923 5.715,18.923 7.239,20.447 9.872,20.447 12.178,18.141 13.609,18.141 14.224,17.526 14.224,12.065 13.716,11.557 12.081,11.557 U3.3
NetC24_1: C24.1 R15.1 U1.14 | length 14.1
  Top Layer w0.254: C24.1 -11.938,-8.675 R15.1 -11.43,-8.636 v1(-10.541,-7.747) ; v1(-2.667,-5.715) -2.667,-5.231 -2.25,-4.814 U1.14
  Bottom Layer w0.254: v1(-10.541,-7.747) -10.414,-7.62 -4.655,-7.62 -2.75,-5.715 v1(-2.667,-5.715)
NetL2_1: L2.1 X1.5 | length 14.9
  Top Layer w0.254: L2.1 5.715,-17.206 v1(5.715,-15.113)
  Bottom Layer w0.254: v1@5.715,-15.494 v1(5.715,-15.113) 5.715,-13.843 7.874,-11.684 10.16,-11.684 11.176,-10.668 12.7,-10.668 13.335,-10.033 X1.5
NetL3_1: L3.1 X2.4 | length 2.7
  Top Layer w0.254: X2.4 -20.066,7.974 -20.066,6.985 -19.558,6.477 L3.1
NetL3_2: L3.2 R33.1 | length 1.8
  Top Layer w0.254: R33.1@-19.558,1.866 L3.2
NetL4_1: L4.1 X2.1 | length 2.6
  Top Layer w0.254: L4.1 -17.526,7.974 X2.1 X2.1@-17.399,7.899
NetL4_2: L4.2 R34.1 | length 2.4
  Top Layer w0.254: R34.1 -17.843,3.304 L4.2
NetL6_1: L6.1 VD2.A | length 4.8
  Top Layer w0.5: VD2.A 13.151,20.377 14.097,19.431 14.097,19.05 14.92,18.227 L6.1
NetP2_1: P2.1 R9.1 U1.44 | length 26
  Top Layer w0.254: v1(-0.762,5.715) -0.75,5.703 U1.44 ; v1@7.112,5.715 8.001,5.715 8.161,5.555 10.828,5.555 12.319,4.064 18.288,4.064 19.558,5.334 19.558,5.969 19.597,6.008 R9.1@19.597,8.509
  Bottom Layer w0.254: v1(-0.762,5.715) v1(6.731,5.715)
NetR8_1: R8.1 X4.4 | length 23.7
  Top Layer w0.3: R8.1 -15.367,-19.558 -12.319,-22.606 -10.668,-22.606 -8.128,-25.146 -3.836,-25.146 X4.4
NetR10_2: R10.2 U1.30 | length 10.1
  Top Layer w0.254: U1.30 5.852,-0.25 7.199,-1.597 11.503,-1.597 12.319,-2.413 R10.2
NetR11_2: R11.2 U1.31 | length 10.1
  Top Layer w0.254: U1.31 6.1,0.25 7.493,-1.143 11.557,-1.143 12.319,-0.381 R11.2
NetR14_1: R14.1 VD1.3 | length 1.7
  Top Layer w0.254: VD1.3 -17.145,-6.604 -16.637,-6.096 R14.1@-16.637,-5.168
NetR15_2: R15.2 R16.2 VD1.2 X4.6 | length 23.3
  Top Layer w0.254: VD1.2 R15.2@-13.838,-8.797 ; R15.2 R16.2
  Top Layer w0.3: R15.2 -13.677,-10.629 -14.097,-11.049 -14.097,-18.923 -11.684,-21.336 -10.287,-21.336 -8.123,-23.5 X4.6
NetR18_2: R18.2 VT2.1 | length 6.2
  Top Layer w0.3: R18.2 -1.767,15.085 0.264,15.085 1.209,14.14 VT2.1
NetR20_2: R20.2 VT2.3 | length 2.2
  Top Layer w0.3: R20.2@1.309,16.51 1.309,15.489 VT2.3
NetR30_2: R30.2 X4.8 | length 16
  Top Layer w0.3: R30.2 -8.851,-18.249 v1(-8.001,-17.399) ; X4.8 2.921,-20.928 v1(2.921,-17.399)
  Bottom Layer w0.3: v1(-8.001,-17.399) v1(2.921,-17.399)
NetU1_7: U1.7 U2.1 | length 12.8
  Top Layer w0.254: U2.1@-7.4,-6.797 -6.543,-6.797 -6.096,-6.35 v1(-6.096,-5.207) ; v1(-7.366,0.544) -7.148,0.762 -6.136,-0.25 U1.7
  Bottom Layer w0.254: v1(-7.366,0.544) -6.096,-0.726 v1(-6.096,-5.207)
POWER.GROUND: X2.6 X3.7 | length 18.5
  Bottom Layer w2: X2.6 -20.04,16.155 -15.114,21.081 -6.821,21.081 X3.7
POWER.VIN: X2.5 X3.1 | length 24.4
  Top Layer w2: X2.5 -21.589,10.54 -21.99,10.941 -21.99,14.078 -14.478,21.59 -11.684,21.59 -9.774,23.5 X3.1
TEMP_SENSOR: C17.2 L2.2 U1.16 | length 18.7
  Top Layer w0.254: U1.16 -1.25,-4.846 -0.508,-5.588 v1(-0.508,-6.604) ; v1(-0.508,-13.716) 0.381,-13.716 1.397,-12.7 1.397,-10.541 1.182,-10.326 C17.2 0.254,-10.072 v1(0.254,-9.017) ; v1(2.921,-14.986) 3.109,-14.986 L2.2
  Bottom Layer w0.254: v1(-0.508,-13.716) 1.651,-13.716 v1(2.921,-14.986) ; v1(-0.508,-6.604) -0.508,-7.947 0.254,-8.709 v1(0.254,-9.017)
USB_BUS.DMINUS: R23.1 X3.12 | length 26.6
  Top Layer w0.254: R23.1 v1(13.589,1.143)
  Bottom Layer w0.254: X3.12 6,19.788 6.858,18.93 6.858,15.367 5.969,14.478 5.969,10.929 9.271,7.627 9.271,6.477 12.178,3.57 12.686,3.57 13.589,2.667 v1(13.589,1.143)
USB_BUS.DPLUS: R20.1 R22.1 X3.5 | length 31.4
  Top Layer w0.254: R20.1 2.706,17.868 3.302,17.272 v1(5.969,17.272) ; X3.5@3.46,23.464 X3.5 ; R22.1 v1(12.446,2.667)
  Bottom Layer w0.254: X3.5 4.699,22.261 4.699,20.447 5.969,19.177 5.969,15.313 5.515,14.859 5.515,10.614 8.817,7.312 8.817,6.289 12.439,2.667 v1(12.446,2.667)
USB_BUS.VBUS: L1.2 X3.8 | length 4
  Top Layer w0.3: L1.2 L1.2@-5.781,18.095
  Top Layer w0.5: L1.2@-5.781,18.095 -4.16,19.716 X3.8
USB_DEV_BUS.D+: R22.2 U1.33 VD5.K | length 9.7
  Top Layer w0.254: U1.33 6.384,1.25 7.253,0.381 7.747,0.381 8.382,1.016 8.382,2.54 8.509,2.667 R22.2 9.31,3.976 9.491,4.157 VD5.K
USB_DEV_BUS.D-: R23.2 U1.32 VD6.K | length 8.3
  Top Layer w0.254: U1.32 6.242,0.75 7.119,-0.127 8.001,-0.127 9.271,1.143 R23.2 9.31,-0.039 9.618,-0.347 VD6.K
USB_DEV_BUS.USB_CONNECT: R17.1 R18.1 U1.41 | length 13.5
  Top Layer w0.254: R18.1 -2.667,8.763 -1.778,7.874 -1.404,7.874 0.75,5.72 U1.41
  Top Layer w0.3: R18.1 -1.866,12.485 -1.524,12.827 -1.524,13.589 -0.928,14.185 R17.1
USB_DEV_BUS.USB_POWER: R19.1 R21.2 U1.2 VD4.K | length 24.2
  Top Layer w0.3: R21.2@-11.723,17.018 -11.596,17.145 VD4.K -7.967,13.301 -7.151,12.485 R19.1 -6.184,12.446 -5.461,12.446 -5.207,12.7 v1(-4.699,12.7) ; v1@-6.965,6.37 -5.281,4.686 -5.281,2.54 -4.991,2.25 U1.2
  Bottom Layer w0.3: v1(-6.985,6.35) -5.334,8.001 -5.334,12.192 -5.08,12.446
VBAT: C13.1 R14.2 U1.1 | length 23.6
  Top Layer w0.254: C13.1@-18.098,-3.468 C13.1 R14.2 -15.709,-3.468 -15.24,-3.937 -12.309,-3.937 -11.274,-4.972 -6.96,-4.972 -6.306,-4.318 v1(-4.953,-4.318) v1@-5.08,-4.445 ; U1.1 -4.025,3.595 v1@-3.937,3.683
  Bottom Layer w0.254: v1(-4.953,-4.318) -4.372,-3.737 -4.372,-1.945 -4.064,-1.637 v1(-4.064,3.683)
WIFI_BUS.WIFI_BOOT: R25.2 U1.28 | length 23.1
  Top Layer w0.254: R25.2 -0.889,-15.748 1.89,-12.969 1.89,-10.219 2.711,-9.398 5.969,-9.398 7.62,-7.747 7.62,-3.302 5.568,-1.25 U1.28
WIFI_BUS.WIFI_CHPD: R28.2 U1.25 | length 15.4
  Top Layer w0.254: R28.2 1.651,-14.859 2.667,-13.843 v1(2.667,-12.065) ; v1@3.937,-3.81 4.025,-3.722 U1.25
  Bottom Layer w0.254: v1(2.667,-12.065) 2.921,-12.065 4.572,-10.414 4.572,-7.62 4.064,-7.112 v1(4.064,-3.81)
WIFI_BUS.WIFI_PWR: R29.2 U1.29 | length 19.9
  Top Layer w0.254: U1.29 5.71,-0.75 8.509,-3.549 8.509,-8.001 7.62,-8.89 7.62,-12.7 v1(8.255,-13.335) ; R29.2@6.731,-16.549 7.62,-15.66 v1(7.62,-15.367)
  Bottom Layer w0.254: v1(7.62,-15.367) 7.62,-15.24 8.255,-14.605 v1(8.255,-13.335)
WIFI_BUS.WIFI_RX: R27.2 U1.13 | length 13.4
  Top Layer w0.254: R27.2 -3.429,-14.478 -4.191,-13.716 -4.191,-6.491 -3.722,-6.022 -3.722,-5.644 -2.75,-4.672 U1.13
WIFI_BUS.WIFI_TX: R26.2 U1.12 | length 14.6
  Top Layer w0.254: R26.2 -5.969,-15.24 -4.684,-13.955 -4.684,-8.187 -4.699,-8.172 -4.699,-6.357 -4.176,-5.834 -4.176,-5.446 -4.025,-5.295 U1.12
WIFI_OUT_BUS.CHPD: R28.1 X4.9 | length 3.3
  Top Layer w0.254: X4.9 1.651,-19.659 R28.1 R28.1@1.62,-18.28
WIFI_OUT_BUS.GPIO0: R25.1 X4.10 | length 3.2
  Top Layer w0.254: X4.10 -0.889,-19.659 R25.1
WIFI_OUT_BUS.RX: R26.1 X4.12 | length 3.2
  Top Layer w0.254: X4.12 -5.969,-19.659 R26.1
WIFI_OUT_BUS.TX: R27.1 X4.11 | length 3.2
  Top Layer w0.254: X4.11 -3.429,-19.659 R27.1
WIFI_OUT_BUS.VCC: R29.1 X4.7 | length 5.2
  Top Layer w0.3: X4.7 6.731,-19.658 6.985,-19.404 R29.1 ; X4.7 6.731,-19.659
pads on no net: U1.17 VD3. VD4. VD5. VD6. X1.6 X4.3

## Polygon pours and split planes (outlines as drawn)
GND on Bottom Layer "GND_POLY" (solid, pour order 5): -26.755,-4.48 cw(c0,0) -26.818,-4.086 cw(c0,0) 27.127,0 cw(c0,0) 26.818,-4.086 cw(c0,0) 26.762,-4.439 cw(c0,0)
GND on Top Layer "GND_POLY_TOP" (solid, pour order 4): -26.755,-4.48 cw(c0,0) -26.818,-4.086 cw(c0,0) 27.127,0 cw(c0,0) 26.818,-4.086 cw(c0,0) 26.762,-4.439 cw(c0,0)

## Other copper
Top Layer:
  text "m v1.1" at -25.1,-6.2 h1.3

## Silkscreen, mask and mechanical layers (free items; w line width, h text height)
Top Overlay:
  circle w0.254: c0,0 r27.15
Mechanical 4:
  lines w0.254: -26.692,-4.067 ccw(c0,0) 26.629,4.459 ; -26.66,-4.271 cw(c0,0) 26.692,4.064
TopAssy:
  lines w0.1: 16.256,-3.937 16.256,3.683 18.796,3.683 18.796,-3.937 16.256,-3.937 ; 18.415,4.953 18.415,7.493 23.495,7.493 23.495,4.953 18.415,4.953

## Text inside footprints (layer, text, board x,y; h text height)
X1: TopRefDes "5" at 11.684,-10.541 h0.7; TopRefDes "1" at 11.684,-13.081 h0.7; TopRefDes "4" at 22.86,-13.081 h0.7; TopRefDes "8" at 22.86,-10.541 h0.7
X2: TopRefDes "6" at -19.532,15.112 h0.7 r90; TopRefDes "3" at -16.992,15.112 h0.7 r90; TopRefDes "4" at -21.844,7.493 h0.7 r90
X3: Bottom Overlay "7" at -9.24,21.468 h1.27 r180; Bottom Overlay "1" at -9.24,24.008 h1.27 r180; Bottom Overlay "6" at 8.032,24.008 h1.27 r180; Bottom Overlay "12" at 8.032,21.468 h1.27 r180
X4: Bottom Overlay "7" at 7.969,-21.468 h1.27; Bottom Overlay "1" at 7.969,-24.008 h1.27; Bottom Overlay "6" at -9.303,-24.008 h1.27; Bottom Overlay "12" at -9.303,-21.468 h1.27